# Altium PCB Laser_current_board.PcbDoc
Units mil, origin at the board's own origin, x right, y up, seen from the top; angles counter-clockwise.
Board outline 3150 x 3940 mil, 2 copper layers (Top Layer, Bottom Layer); 34 components, 90 nets, 172 pads, 0 vias.
Unrouted connection lines stored in the file: 71.
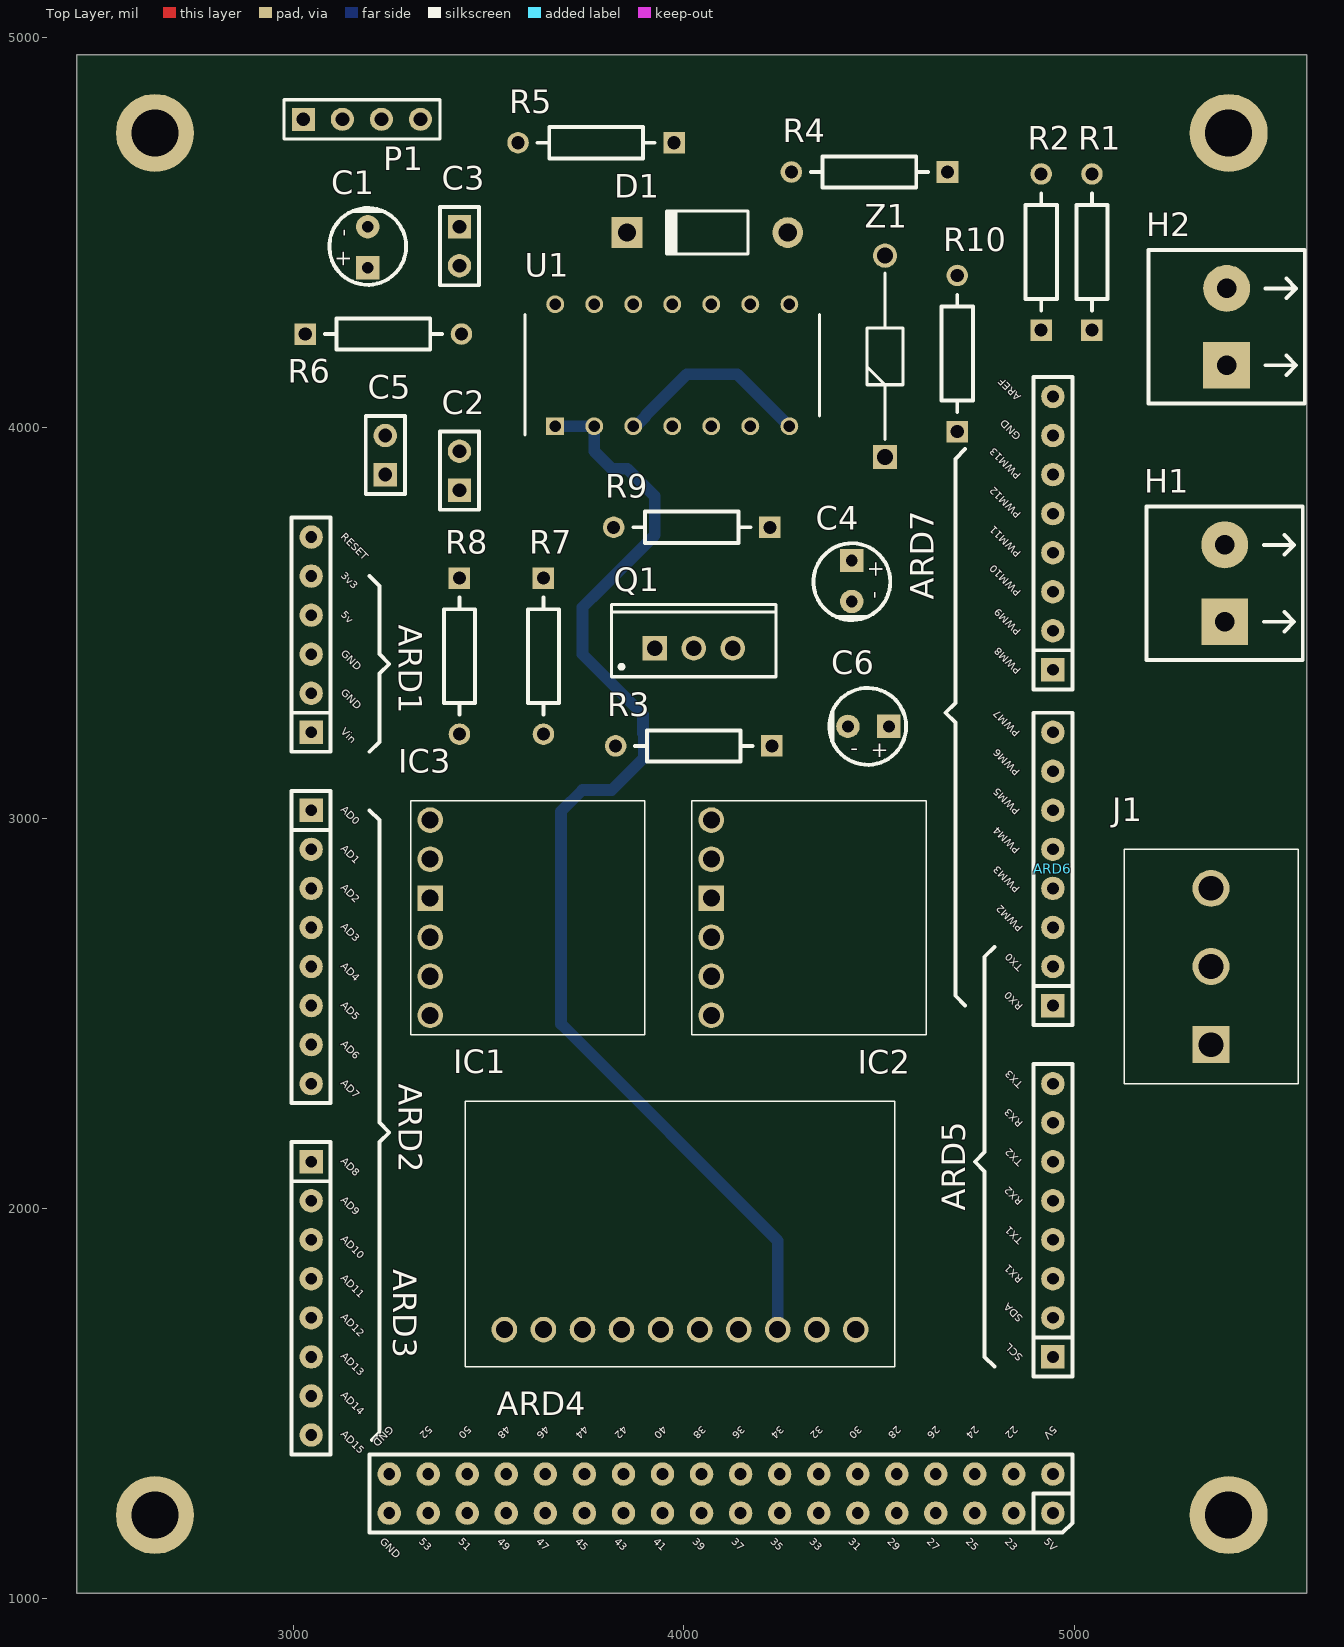
[diagram p0: Top Layer view]
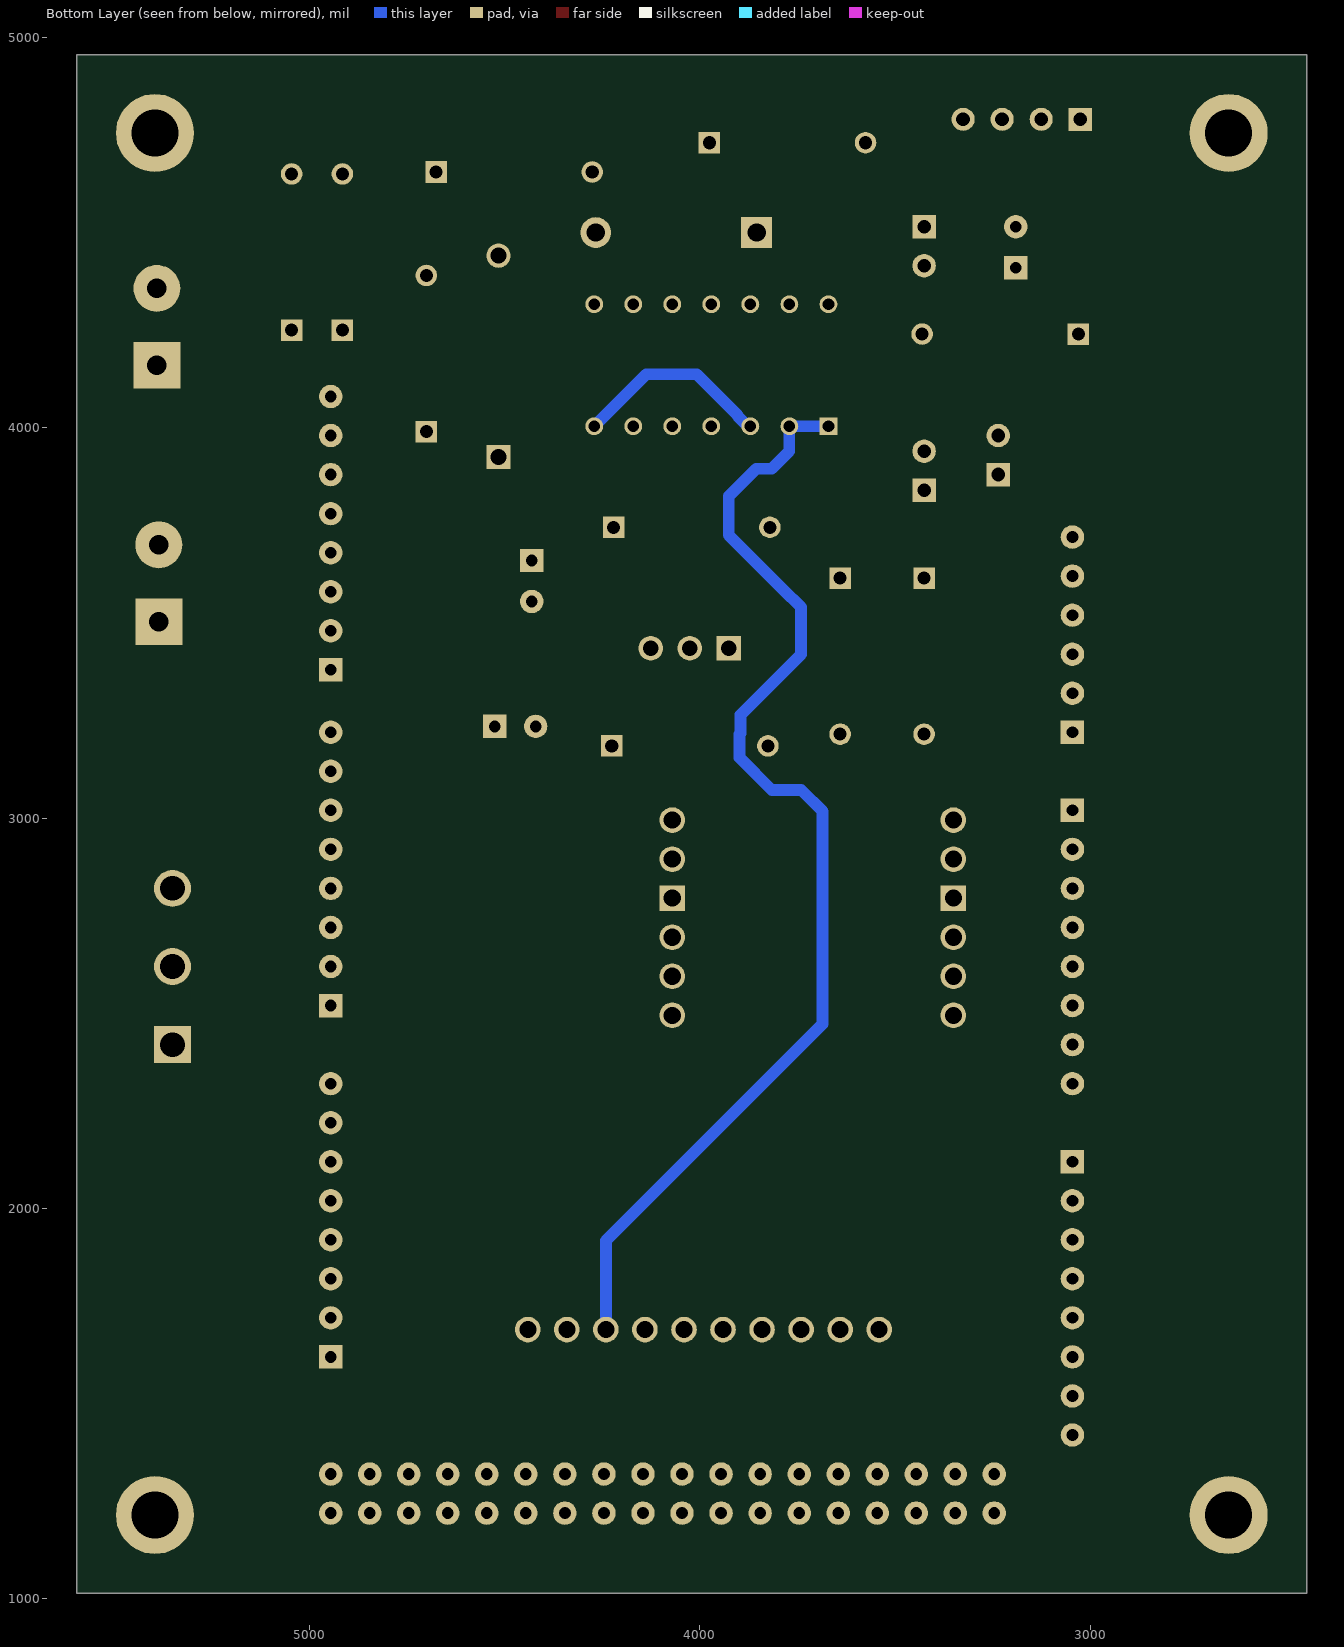
[diagram p1: Bottom Layer view, seen from below]

## Layer stack, top to bottom
Top Solder: solder mask 0.4, Solder Resist, Dk 3.5
Top Layer: signal copper 1.4
Dielectric 1: dielectric 12.6, FR-4, Dk 4.8
Bottom Layer: signal copper 1.4
Bottom Solder: solder mask 0.4, Solder Resist, Dk 3.5

## Board outline
2445,1015 5595,1015 5595,4955 2445,4955

## Design rules (kind name [scope] priority, off if disabled: settings)
Clearance [All] p1: gap=30 ignorepadtopadclearanceinfootprint=FALSE
PolygonConnect [All] p1: connectstyle=Relief reliefconductorwidth=10 reliefentries=4 polygonreliefangle="90 Angle" airgapwidth=10
RoutingVias [All] p1: holewidth=28 width=50 viastyle="Through Hole" minholewidth=28 minwidth=50 maxholewidth=28 maxwidth=50
SolderMaskExpansion [All] p1: expansion=4 istentingtop=FALSE
Width [All] p1: maxlimit=50 minlimit=30 preferedwidth=30
30 further rules are at their usual default settings.

## Classes and differential pairs
component class Laser_current_board: C1 C2 C3 C4 C5 C6 D1 H1 H2 IC1 IC2 IC3 J1 P1 Q1 R1 R2 R3 R4 R5 R6 R7 R8 R9 R10 U1 Z1
component class "Arduino connecions": ARD1 ARD2 ARD3 ARD4 ARD5 ARD6 ARD7

## Components (designator, comment, footprint, x,y, rotation, side; value= is the part's Value field where it differs from the comment)
ARD1 "" "Header 6x1 8.5mm" 3045,3220 r90 top locked
ARD2 "AD_L" "Header 8x1 8.5mm" 3045,3020 r270 top locked
ARD3 "AD_H" "Header 8x1 8.5mm" 3045,2120 r270 top locked
ARD4 "IO_36" "HEADER 36X 8MM" 4945,1220 r180 top locked
ARD5 "Communication" "Header 8x1 8.5mm" 4945,1620 r90 top
ARD6 "PWM_L" "Header 8x1 8.5mm" 4945,2520 r90 top locked
ARD7 "PWM_H" "Header 8x1 8.5mm" 4945,3380 r90 top locked
C1 "CapacitorPol" CP-5.0mm-11.0mm-2.0mm 3190,4410 r270 top value=4.7uF
C2 "Capacitor" C100-200-100 3425,3840 r90 top value=100nF
C3 "Capacitor" C100-200-100 3425,4515 r270 top value=100nF
C4 "CapacitorPol" CP-5.0mm-11.0mm-2.0mm 4430,3660 r90 top value=33uF
C5 "Capacitor" C100-200-100 3235,3880 r90 top value=100nF
C6 "CapacitorPol" CP-5.0mm-11.0mm-2.0mm 4525,3235 r0 top value=10uF
D1 "Diode 1N4007" DO-41 4060,4500 r180 top
H1 "LASER" TB02 5385,3503.15 r90 top
H2 "NTC" TB02 5390,4160 r90 top
IC1 "ADS1115" ADS1115 3540,1690 r0 top
IC2 "BOB-12918" BOB12918 4070,2795 r0 top
IC3 "BOB-12918" BOB12918 3350,2795 r0 top
J1 "TB010-508-03BE" TB01050803BE 5350,2420 r90 top
P1 "Header 4" HDR1X4 3025,4790 r0 top
Q1 "TIP127" TO-220AB 4025,3435 r0 top
R1 "Resistor" R400-2.0mm 5045,4250 r90 top value=22
R2 "Resistor" R400-2.0mm 4915,4250 r90 top value=100k
R3 "Resistor" R400-2.0mm 4225,3185 r180 top value=1k2
R4 "Resistor" R400-2.0mm 4675,4655 r180 top value=1k
R5 "Resistor" R400-2.0mm 3975,4730 r180 top value=100k
R6 "Resistor" R400-2.0mm 3030,4240 r0 top value=10k
R7 "Resistor" R400-2.0mm 3640,3615 r270 top value=1R8
R8 "Resistor" R400-2.0mm 3425,3615 r270 top value=10k
R9 "Resistor" R400-2.0mm 4220,3745 r180 top value=100k
R10 "Resistor" R400-2.0mm 4700,3990 r90 top value=10k
U1 "LM324AN" DIP794W56P254L1905H533Q14N 3970,4160 r90 top
Z1 "1N4731A-TR" DIOAD1310W86L370D235 4515,3925 r90 top

## Footprints (in the part's own frame and the unit in brackets; to place one, negate y for a bottom-side part, rotate by r counter-clockwise, add the part's x,y. Pads: shape width x height; smd on the part's side, far side on the other; paste and mask are expansions set on the pad)
ADS1115 [mm]
  round 1.665 hole 1.11: 1(0,0) 2(2.54,0) 3(5.08,0) 4(7.62,0) 5(10.16,0) 6(12.7,0) 7(15.24,0) 8(17.78,0) 9(20.32,0) 10(22.86,0)
  silkscreen extent -2.54,-2.41 25.4,14.86, body extent -2.54,-2.41 25.4,14.86, height 3.35
BOB12918 [mm]
  rect 1.665x1.665 hole 1.11: 1(0,0)
  round 1.665 hole 1.11: 2(0,-2.54) 3(0,-5.08) 4(0,-7.62) 5(0,5.08) 6(0,2.54)
  silkscreen extent -1.27,-8.89 13.97,6.35, body extent -1.27,-8.89 13.97,6.35, height 2.1
C100-200-100 [mil]
  rect 60x60 hole 35: 1(0,0)
  round 60 hole 35: 2(100,0)
  silkscreen extent -50,-50 150,50, body extent -65,-35 165,32, height 245
CP-5.0mm-11.0mm-2.0mm [mil]
  rect 60x60 hole 30: 1(0,0)
  round 60 hole 30: 2(-105,0)
  silkscreen extent -153,-98 44,98, body extent -154,-101 44,98, height 454
DIOAD1310W86L370D235 [mm]
  rect 1.575x1.575 hole 1.05: 1(0,0)
  round 1.575 hole 1.05: 2(13.1,0)
  silkscreen extent 1.14,-1.17 11.96,1.17, body extent -0.43,-1.3 13.53,1.3, height 2.59
DIP794W56P254L1905H533Q14N [mil]
  rect 45.63x45.63 hole 29.88: 1(-156.26,300)
  round 45.63 hole 29.88: 2(-156.26,200) 3(-156.26,100) 4(-156.26,0) 5(-156.26,-100) 6(-156.26,-200) 7(-156.26,-300) 8(156.26,-300) 9(156.26,-200) 10(156.26,-100) 11(156.26,0) 12(156.26,100) 13(156.26,200) 14(156.26,300)
  silkscreen extent -179,-377 130,377, body extent -167,-375 167,375, height 172
DO-41 [mm] "Diode, Axial; Body 5.2 x 2.7 mm (LxDia. max), Lead Dia. 0.86 mm (max)"
  round 2 hole 1.2: 1(-5.23,0)
  rect 2x2 hole 1.2: 2(5.23,0)
  silkscreen extent -2.65,-1.4 2.75,1.4
HDR1X4 [mm] "Connector; Header; 4 Position"
  rect 1.5x1.5 hole 0.9: 1(0,0)
  round 1.5 hole 0.9: 2(2.54,0) 3(5.08,0) 4(7.62,0)
  silkscreen extent -1.27,-1.27 8.89,1.27
"Header 6x1 8.5mm" [mil] "Stackable 6 pin header"
  rect 60x60 hole 30: 1(0,0)
  round 60 hole 30: 2(100,0) 3(200,0) 4(300,0) 5(400,0) 6(500,0)
  silkscreen extent -50,-50 550,50, body extent -50,-50 550,50, height 335
"Header 8x1 8.5mm" [mil] "Stackable 8 pin header"
  rect 60x60 hole 30: 1(0,0)
  round 60 hole 30: 2(100,0) 3(200,0) 4(300,0) 5(400,0) 6(500,0) 7(600,0) 8(700,0)
  silkscreen extent -50,-50 750,50, body extent -50,-50 750,50, height 335
"HEADER 36X 8MM" [mil] "Stackable 10 pin header"
  round 60 hole 30: 1(0,0) 2(0,-100) 3(100,0) 4(100,-100) 5(200,0) 6(200,-100) 7(300,0) 8(300,-100) 9(400,0) 10(400,-100) 11(500,0) 12(500,-100) 13(600,0) 14(600,-100) 15(700,0) 16(700,-100) 17(800,0) 18(800,-100) 19(900,-100) 20(900,0) 21(1000,0) 22(1000,-100) 23(1100,0) 24(1100,-100) 25(1200,0) 26(1200,-100) 27(1300,0) 28(1300,-100) 29(1400,0) 30(1400,-100) 31(1500,0) 32(1500,-100) 33(1600,0) 34(1600,-100) 35(1700,0) 36(1700,-100)
  silkscreen extent -50,-150 1750,50, body extent -50,-150 1750,50, height 335
R400-2.0mm [mm]
  rect 1.4x1.4 hole 0.85: 1(0,0)
  round 1.4 hole 0.85: 2(10.16,0)
  silkscreen extent 1.27,-1.02 8.89,1.02, body extent -0.3,-1.17 10.46,1.14, height 2.93
TB02 [mil]
  rect 120x120 hole 50: 1(0,0)
  round 120 hole 50: 2(196.85,0)
  silkscreen extent -98,-200 295,200, body extent -123,-190 294,216, height 559
TB01050803BE [mm]
  rect 2.4x2.4 hole 1.6: 1(0,0)
  round 2.4 hole 1.6: 2(5.08,0) 3(10.16,0)
  silkscreen extent -2.54,-5.66 12.7,5.64, body extent -2.54,-5.66 12.7,5.64, height 18.3
TO-220AB [mm] "TO, Thru-Hole, Vertical, Heatsink Mounted; 3 In-Line Leads; Pitch 2.54 mm"
  rect 1.6x1.6 hole 1: 1(-2.54,0)
  round 1.6 hole 1: 2(0,0) 3(2.54,0)
  silkscreen extent -5.35,-1.85 5.35,2.85, body extent -5.4,-1.9 5.4,2.9, height 19.3

## Part data
ARD1: library part POWER, "POWER", Supplier Part Number 1=52553843, Supplier 1=Arrow, Supplier 2=Arrow, Supplier 3=Digi-Key, Supplier 4=Arrow, Supplier 5=Arrow, Supplier Part Number 2=2699075, Supplier Part Number 3=SAM1198-06-ND, Supplier Part Number 4=2699089, Supplier Part Number 5=2699088
ARD2 ARD5 ARD7: Supplier Part Number 1=SAM1198-08-ND, Supplier 1=Digi-Key, Supplier 2=Arrow, Supplier 3=Arrow, Supplier 4=Arrow
  ARD2: Supplier 5=Arrow, Supplier Part Number 2=2698939, Supplier Part Number 3=2698940, Supplier Part Number 4=43085273, Supplier Part Number 5=2698925
  ARD5 ARD7: Supplier Part Number 2=2698940, Supplier Part Number 3=2698939, Supplier Part Number 4=2698925
ARD3 ARD6: Supplier Part Number 1=2698940, Supplier 1=Arrow, Supplier 2=Arrow, Supplier 3=Digi-Key, Supplier 4=Arrow, Supplier Part Number 2=2698939, Supplier Part Number 3=SAM1198-08-ND, Supplier Part Number 4=2698925
ARD4: Supplier Part Number 1=SAM1196-18-ND, Supplier 1=Digi-Key, Supplier 2=Arrow, Supplier 3=Arrow, Supplier 4=Arrow, Supplier 5=Arrow, Supplier Part Number 2=48117090, Supplier Part Number 3=46093326, Supplier Part Number 4=2698278, Supplier Part Number 5=2698268
C1 C4 C6: "Solid Aluminum Capacitor with Organic Semiconductor Electrolyte: 100uF, 10V, Bulk Pack", Voltage="25 V", ComponentLink1Description="Manufacturer Link", ComponentLink1URL=http://www.vishay.com/, ComponentLink2Description=Datasheet, ComponentLink2URL=http://www.vishay.com/docs/90003/94sa.pdf, DatasheetDocument=29-Jun-2001, DrillSize="Nominal, Rounded to the nearest 0.1mm", Note="Part Numbers shown are for ± 20% capacitance tolerance (X0).", PackageReference=E, PCB_Layout="Complies with Manufacturer's Recommendation.", Published=19-Mar-2004, Publisher="Altium Limited"
C2 C3 C5: Voltage="100 V", LatestRevisionDate=17-Jul-2002, LatestRevisionNote="Re-released for DXP Platform.", PackageReference=RAD-0.3, Published=8-Jun-2000, Publisher="Altium Limited"
D1: "1 Amp General Purpose Rectifier", Code_JEDEC=DO-204-AL, ComponentLink1Description="Manufacturer Link", ComponentLink1URL=http://www.fairchildsemi.com/, ComponentLink2Description=Datasheet, ComponentLink2URL=http://www.fairchildsemi.com/ds/1N%2F1N4001.pdf, DatasheetVersion=1998, LatestRevisionDate=17-Jul-2002, LatestRevisionNote="Re-released for DXP Platform.", PackageDescription="Diode, Axial; Body 5.2 x 2.7 mm (LxDia. max), Lead Dia. 0.86 mm (max)", PackageReference=DO-41, PackageVersion=Aug-1999, Published=8-Jun-2000, Publisher="Altium Limited"
H1 H2: library part Terminal_1x2, "Bloco terminal 1x2"
IC1: "Integrated Circuit", Manufacturer_Name=Adafruit, Datasheet Link=https://cdn-learn.adafruit.com/downloads/pdf/adafruit-4-channel-adc-breakouts.pdf, Height=3.25mm, Manufacturer_Part_Number=ADS1115
IC2 IC3: "Integrated Circuit", Manufacturer_Name=SparkFun, Mouser Part Number=474-BOB-12918, Arrow Part Number=BOB-12918, Arrow Price/Stock=https://www.arrow.com/en/products/bob-12918/sparkfun-electronics?region=nac, Datasheet Link=https://www.sparkfun.com/products/12918, Height=2mm, Manufacturer_Part_Number=BOB-12918, Mouser Price/Stock=https://www.mouser.co.uk/ProductDetail/SparkFun/BOB-12918?qs=WyAARYrbSnZElsWSnCaKMQ%3D%3D
J1: "Connector", Manufacturer_Name="CUI Inc.", Mouser Part Number=490-TB010-508-03BE, Arrow Part Number=TB010-508-03BE, Arrow Price/Stock=https://www.arrow.com/en/products/tb010-508-03be/cui-devices?region=nac, Datasheet Link=https://componentsearchengine.com/Datasheets/1/TB010-508-03BE.pdf, Height=18.2mm, Manufacturer_Part_Number=TB010-508-03BE, Mouser Price/Stock=https://www.mouser.co.uk/ProductDetail/CUI-Devices/TB010-508-03BE?qs=vLWxofP3U2z1pw1VuAsf2Q%3D%3D
P1: "Header, 4-Pin", LatestRevisionDate=17-Jul-2002, LatestRevisionNote="Re-released for DXP Platform.", Publisher="Altium Limited"
Q1: "Transistor BJT PNP", Manufacturer_Name=onsemi, Mouser Part Number=512-TIP127, Arrow Part Number=TIP127, Arrow Price/Stock=https://www.arrow.com/en/products/tip127/on-semiconductor, Datasheet Link=http://www.onsemi.com/pub/Collateral/TIP120-D.PDF, Height=4.83mm, Manufacturer_Part_Number=TIP127, Mouser Price/Stock=https://www.mouser.co.uk/ProductDetail/ON-Semiconductor-Fairchild/TIP127?qs=ljbEvF4DwOMFP7NR%2F8L9Tw%3D%3D
R1 R2 R3 R4 R5 R6 R7 R8 R9 R10: Power="1/8 W", Tolerance=5%, LatestRevisionDate=17-Jul-2002, LatestRevisionNote="Re-released for DXP Platform.", PackageReference=AXIAL-0.3, Published=8-Jun-2000, Publisher="Altium Limited"
U1: "Quadruple Operational Amplifier", ComponentLink1Description="Manufacturer Link", ComponentLink1URL=http://www.ti.com/, ComponentLink2Description=Datasheet, ComponentLink2URL=http://www-s.ti.com/sc/ds/lm324.pdf, DatasheetVersion=Jan-1989, LatestRevisionDate=04-Mar-2005, LatestRevisionNote="Stylized 3D Model Added.", PackageDescription="DIP; 14 Leads; Row Spacing 7.62 mm; Pitch 2.54 mm", PackageReference=N014, PackageVersion=Oct-1995, Published=15-Apr-2002, Publisher="Altium Limited"
Z1: "Zener Diode", Manufacturer_Name=Vishay, Mouser Part Number=78-1N4731A, Arrow Part Number=1N4731A-TR, Arrow Price/Stock=https://www.arrow.com/en/products/1n4731a-tr/vishay, Datasheet Link=https://datasheet.datasheetarchive.com/originals/distributors/Datasheets-314/271599.pdf, Manufacturer_Part_Number=1N4731A-TR, Mouser Price/Stock=https://www.mouser.co.uk/ProductDetail/Vishay-Semiconductors/1N4731A-TR?qs=oNDV51lhjEN87sfLnBRrvg%3D%3D

## Free pads (board coordinates)
  round 200 hole 120: 1(2645,4755) 2(5395,4755) 3(2645,1215) 4(5395,1215)

## Nets (pads, with @x,y where several pads share a name; then routed paths per layer and width w, separated by ;. In a path a pad name is that pad's centre, name@x,y a point inside that pad or via, vN(x,y) a via of type N, cw(c..) or ccw(c..) an arc to the next point about the centre after c; other vN are vias at no path point)
3V3: ARD1.5
5V: ARD1.4 ARD4.1 ARD4.2 H2.1 IC1.1 IC2.3 IC3.3
+12: C1.1 C2.2 J1.1 R1.1 R2.1 U1.4
AD0: ARD2.1
AD1: ARD2.2
AD2: ARD2.3
AD3: ARD2.4
AD4: ARD2.5
AD5: ARD2.6
AD6: ARD2.7
AD7: ARD2.8
AD8: ARD3.1
AD9: ARD3.2
AD10: ARD3.3
AD11: ARD3.4
AD12: ARD3.5
AD13: ARD3.6
AD14: ARD3.7
AD15: ARD3.8
AREF: ARD7.8
GND: ARD1.2 ARD1.3 ARD4.35 ARD4.36 ARD7.7 C1.2 C2.1 C3.1 C4.2 C5.1 C6.2 D1.1 H1.2 IC1.2 IC2.4 IC2.6 IC3.4 IC3.6 J1.3 P1.3 P1.4 R5.2 R10.1 U1.11 Z1.2
IO22: ARD4.3
IO23: ARD4.4
IO24: ARD4.5
IO25: ARD4.6
IO26: ARD4.7
IO27: ARD4.8
IO29: ARD4.10
IO30: ARD4.11
IO31: ARD4.12
IO32: ARD4.13
IO33: ARD4.14
IO34: ARD4.15
IO35: ARD4.16
IO36: ARD4.17
IO37: ARD4.18
IO38: ARD4.19
IO39: ARD4.20
IO40: ARD4.21
IO41: ARD4.22
IO42: ARD4.23
IO43: ARD4.24
IO44: ARD4.25
IO45: ARD4.26
IO46: ARD4.27
IO47: ARD4.28
IO48: ARD4.29
IO49: ARD4.30
IO50: ARD4.31
IO51: ARD4.32
IO52: ARD4.33
IO53: ARD4.34
LIN: C6.1 D1.2 H1.1 R7.2 R8.2 Z1.1
NetC3_2: C3.2 R3.1 U1.9
NetC4_1: C4.1 Q1.1 R2.2 R4.1
NetH2_2: H2.2 R10.2 U1.12
NetIC2_5: IC2.5 P1.2 R3.2
NetIC3_5: IC3.5 P1.1
NetQ1_2: Q1.2 R6.2 R7.1
NetQ1_3: Q1.3 R1.2
NetR4_2: R4.2 U1.8
NetR5_1: R5.1 R6.1 U1.5
NetR8_1: R8.1 R9.2 U1.6
NetR9_1: R9.1 U1.3 U1.7 U1.10 | length 511.9
  Bottom Layer w30: U1.3 3874.23,4003.74 3882.04,4011.56 3884.61,4011.56 3902.18,4029.13 3902.18,4031.83 4007.3,4136.94 4136.8,4136.94 U1.7
PWM2: ARD6.3
PWM3: ARD6.4
PWM4: ARD6.5
PWM5: ARD6.6
PWM6: ARD6.7
PWM7: ARD6.8 IC1.5
PWM8: ARD7.1
PWM9: ARD7.2
PWM10: ARD7.3
PWM11: ARD7.4
PWM12: ARD7.5
PWM13: ARD7.6
RESET: ARD1.6
RX0: ARD6.1
RX1: ARD5.3
RX2: ARD5.5
RX3: ARD5.7
SCL: ARD5.1 IC1.3 IC2.1 IC3.1
SDA: ARD5.2 IC1.4 IC2.2 IC3.2
TEMP_IN: IC1.9 U1.13 U1.14
TX0: ARD6.2
TX1: ARD5.4
TX2: ARD5.6
TX3: ARD5.8
VIN: ARD1.1 J1.2
VSENSE_LASER: C5.2 IC1.8 U1.1 U1.2 | length 3005
  Bottom Layer w30: U1.1 U1.2 3770,3940 3815,3895 3855,3895 3925,3825 3925,3725 3786.79,3586.79 3740,3540 3740,3420 3895,3265 3895,3217.61 3897.56,3215.05 3897.56,3154.95 3814.77,3072.16 3740,3072.16 3685,3017.16 3685,2472.84 4240,1917.84 IC1.8
pads on no net: ARD4.9 IC1.6 IC1.7 IC1.10

## Silkscreen, mask and mechanical layers (free items; w line width, h text height)
Top Overlay:
  lines w10: 3195,3020 3220,2995 3220,2220 3245,2195 3220,2170 3220,1427.07 3200.23,1407.3 ; 3195,3170 3220,3195 3220,3370 3245,3395 3220,3420 3220,3595 3195,3620 ; 4720,2520 4695,2545 4695,3245 4670,3270 4695,3295 4695,3920 4720,3945 ; 4795,1595 4770,1620 4770,2095 4745,2120 4770,2145 4770,2645 4795,2670
  text "AREF" at 4865,4080 h20 r135
  text "GND" at 4865,3980 h20 r135
  text "PWM13" at 4865,3880 h20 r135
  text "PWM12" at 4865,3780 h20 r135
  text "RESET" at 3120,3720 h20 r315
  text "PWM11" at 4865,3680 h20 r135
  text "3v3" at 3120,3620 h20 r315
  text "PWM10" at 4865,3580 h20 r135
  text "5v" at 3120,3520 h20 r315
  text "PWM9" at 4865,3480 h20 r135
  text "GND" at 3120,3420 h20 r315
  text "PWM8" at 4865,3380 h20 r135
  text "GND" at 3120,3320 h20 r315
  text "Vin" at 3120,3220 h20 r315
  text "PWM7" at 4862.93,3220 h20 r135
  text "PWM6" at 4862.93,3120 h20 r135
  text "AD0" at 3120,3020 h20 r315
  text "PWM5" at 4862.93,3020 h20 r135
  text "AD1" at 3120,2920 h20 r315
  text "PWM4" at 4862.93,2920 h20 r135
  text "AD2" at 3120,2820 h20 r315
  text "PWM3" at 4862.93,2820 h20 r135
  text "AD3" at 3120,2720 h20 r315
  text "PWM2" at 4870,2720 h20 r135
  text "AD4" at 3120,2620 h20 r315
  text "TX0" at 4870,2620 h20 r135
  text "AD5" at 3120,2520 h20 r315
  text "RX0" at 4870,2520 h20 r135
  text "AD6" at 3120,2420 h20 r315
  text "AD7" at 3120,2320 h20 r315
  text "TX3" at 4870,2320 h20 r135
  text "RX3" at 4870,2220 h20 r135
  text "AD8" at 3120,2120 h20 r315
  text "TX2" at 4870,2120 h20 r135
  text "AD9" at 3120,2020 h20 r315
  text "RX2" at 4870,2020 h20 r135
  text "AD10" at 3120,1920 h20 r315
  text "TX1" at 4870,1920 h20 r135
  text "AD11" at 3120,1820 h20 r315
  text "RX1" at 4870,1820 h20 r135
  text "AD12" at 3120,1720 h20 r315
  text "SDA" at 4870,1720 h20 r135
  text "AD13" at 3120,1620 h20 r315
  text "SCL" at 4870,1620 h20 r135
  text "AD14" at 3120,1520 h20 r315
  text "GND" at 3245,1445 h20 r225
  text "52" at 3345,1445 h20 r225
  text "50" at 3445,1445 h20 r225
  text "48" at 3545,1445 h20 r225
  text "46" at 3645,1445 h20 r225
  text "44" at 3745,1445 h20 r225
  text "42" at 3845,1445 h20 r225
  text "40" at 3945,1445 h20 r225
  text "38" at 4045,1445 h20 r225
  text "36" at 4145,1445 h20 r225
  text "34" at 4245,1445 h20 r225
  text "32" at 4345,1445 h20 r225
  text "30" at 4445,1445 h20 r225
  text "28" at 4545,1445 h20 r225
  text "26" at 4645,1445 h20 r225
  text "24" at 4745,1445 h20 r225
  text "22" at 4845,1445 h20 r225
  text "5V" at 4945,1445 h20 r225
  text "AD15" at 3120,1420 h20 r315
  text "GND" at 3220,1145 h20 r315
  text "53" at 3320,1145 h20 r315
  text "51" at 3420,1145 h20 r315
  text "49" at 3520,1145 h20 r315
  text "47" at 3620,1145 h20 r315
  text "45" at 3720,1145 h20 r315
  text "43" at 3820,1145 h20 r315
  text "41" at 3920,1145 h20 r315
  text "39" at 4020,1145 h20 r315
  text "37" at 4120,1145 h20 r315
  text "35" at 4220,1145 h20 r315
  text "33" at 4320,1145 h20 r315
  text "31" at 4420,1145 h20 r315
  text "29" at 4520,1145 h20 r315
  text "27" at 4620,1145 h20 r315
  text "25" at 4720,1145 h20 r315
  text "23" at 4820,1145 h20 r315
  text "5V" at 4920,1145 h20 r315
Mechanical 1:
  lines w5: 2945,4955 2945,1120 2995,1120 3095,1020 4445,1020 4545,1120 4945,1120 5045,1220 5045,4950
  lines w20: 2445,1015 5595,1015 5595,4955 2445,4955 2445,1015

## Text inside footprints (layer, text, board x,y; h text height)
C1: Top Overlay "-" at 3145,4488.74 h40 r90; Top Overlay "+" at 3145,4410 h40 r90
C4: Top Overlay "-" at 4475,3581.26 h40 r270; Top Overlay "+" at 4475,3660 h40 r270
C6: Top Overlay "-" at 4446.26,3190 h40 r180; Top Overlay "+" at 4525,3190 h40 r180